# Altium PCB modular8_master_001.PcbDoc
Units mil, origin at the board's own origin, x right, y up, seen from the top; angles counter-clockwise.
Board outline 1417.32 x 1417.32 mil, 2 copper layers (Top Layer, Bottom Layer); 19 components, 33 nets, 119 pads, 79 vias.
Unrouted connection lines stored in the file: 3.
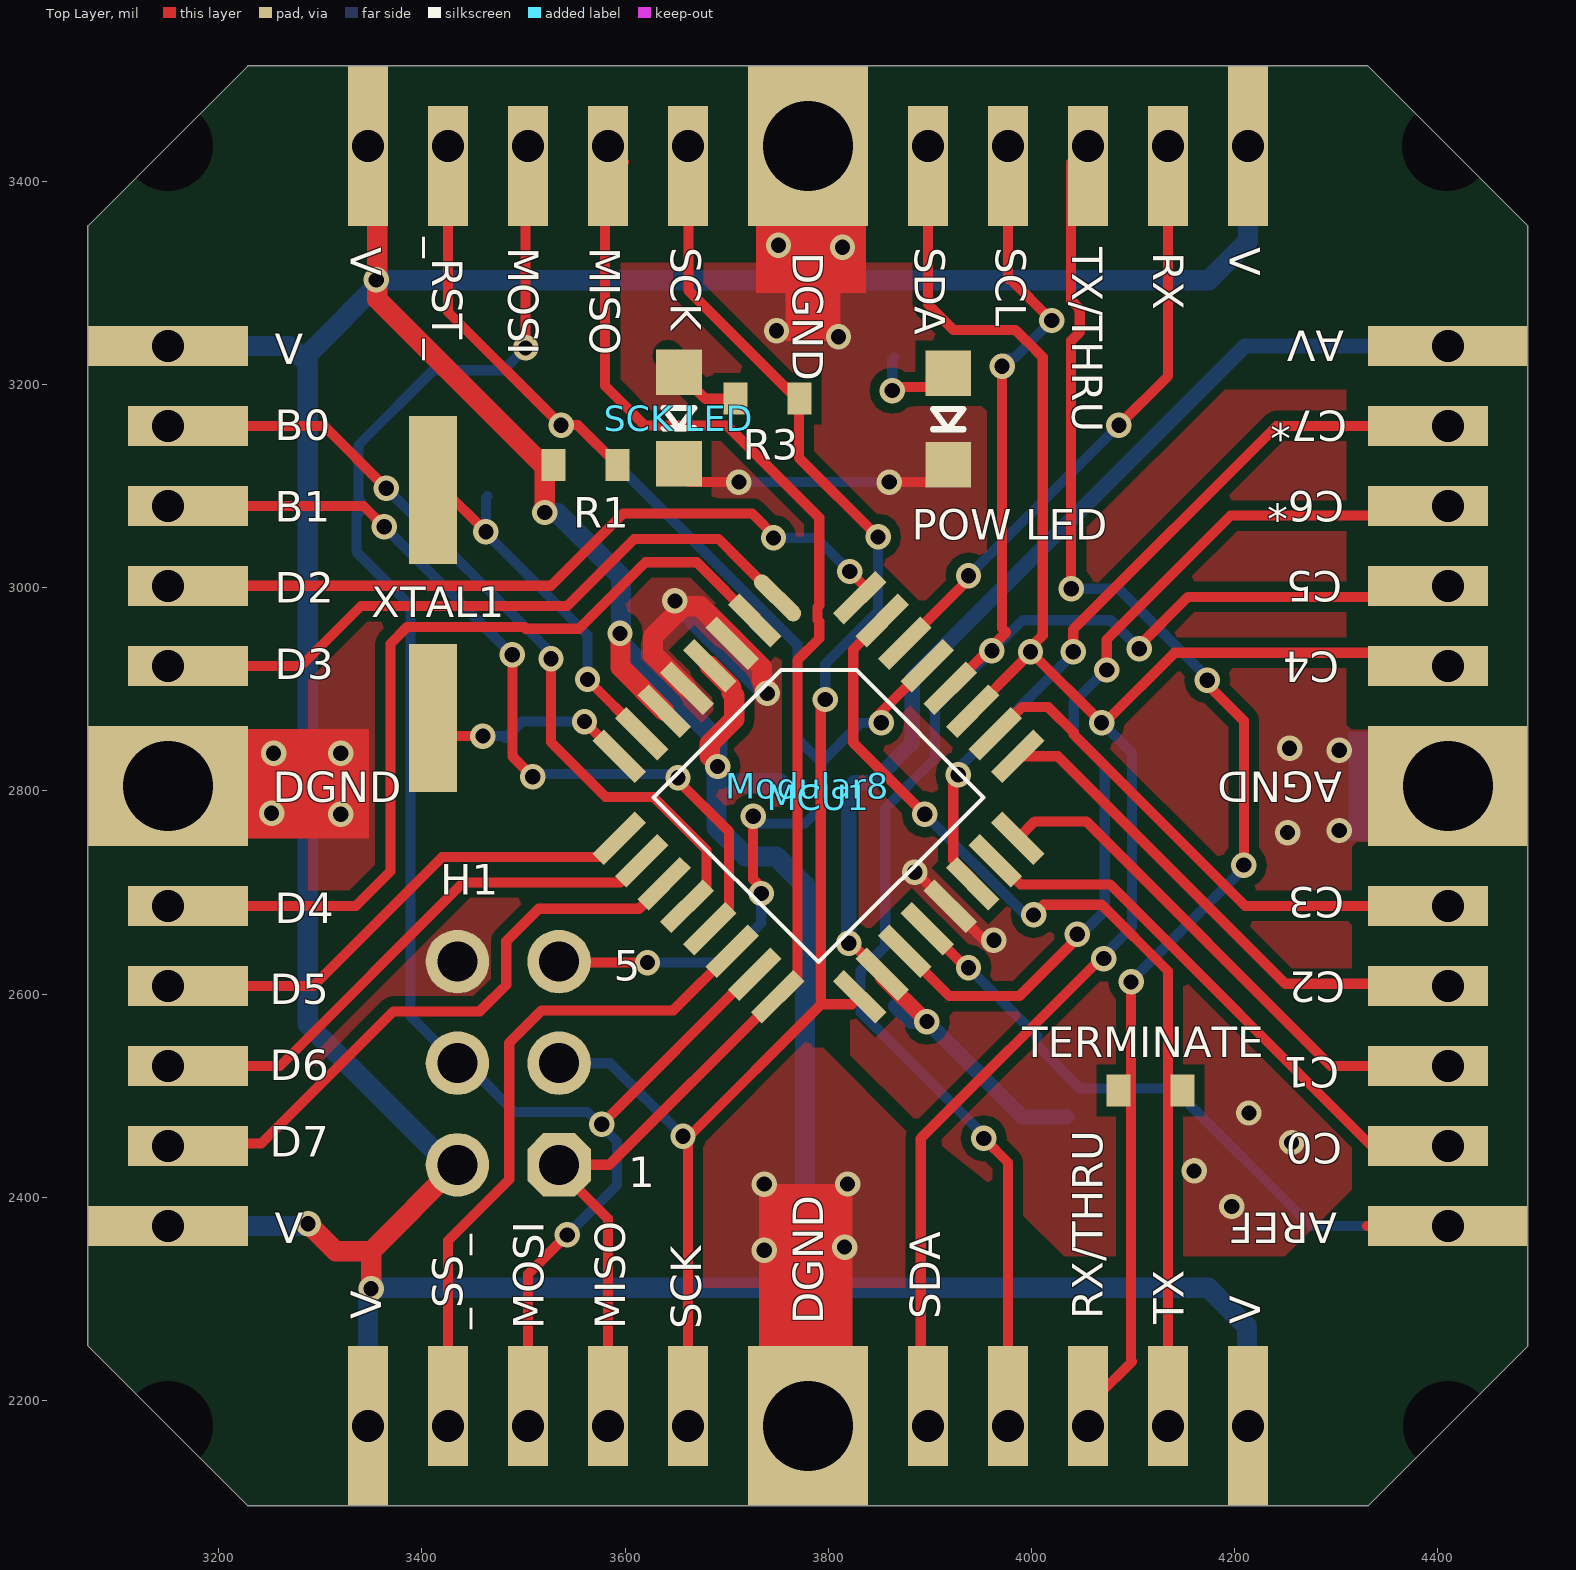
[diagram p0: Top Layer view]
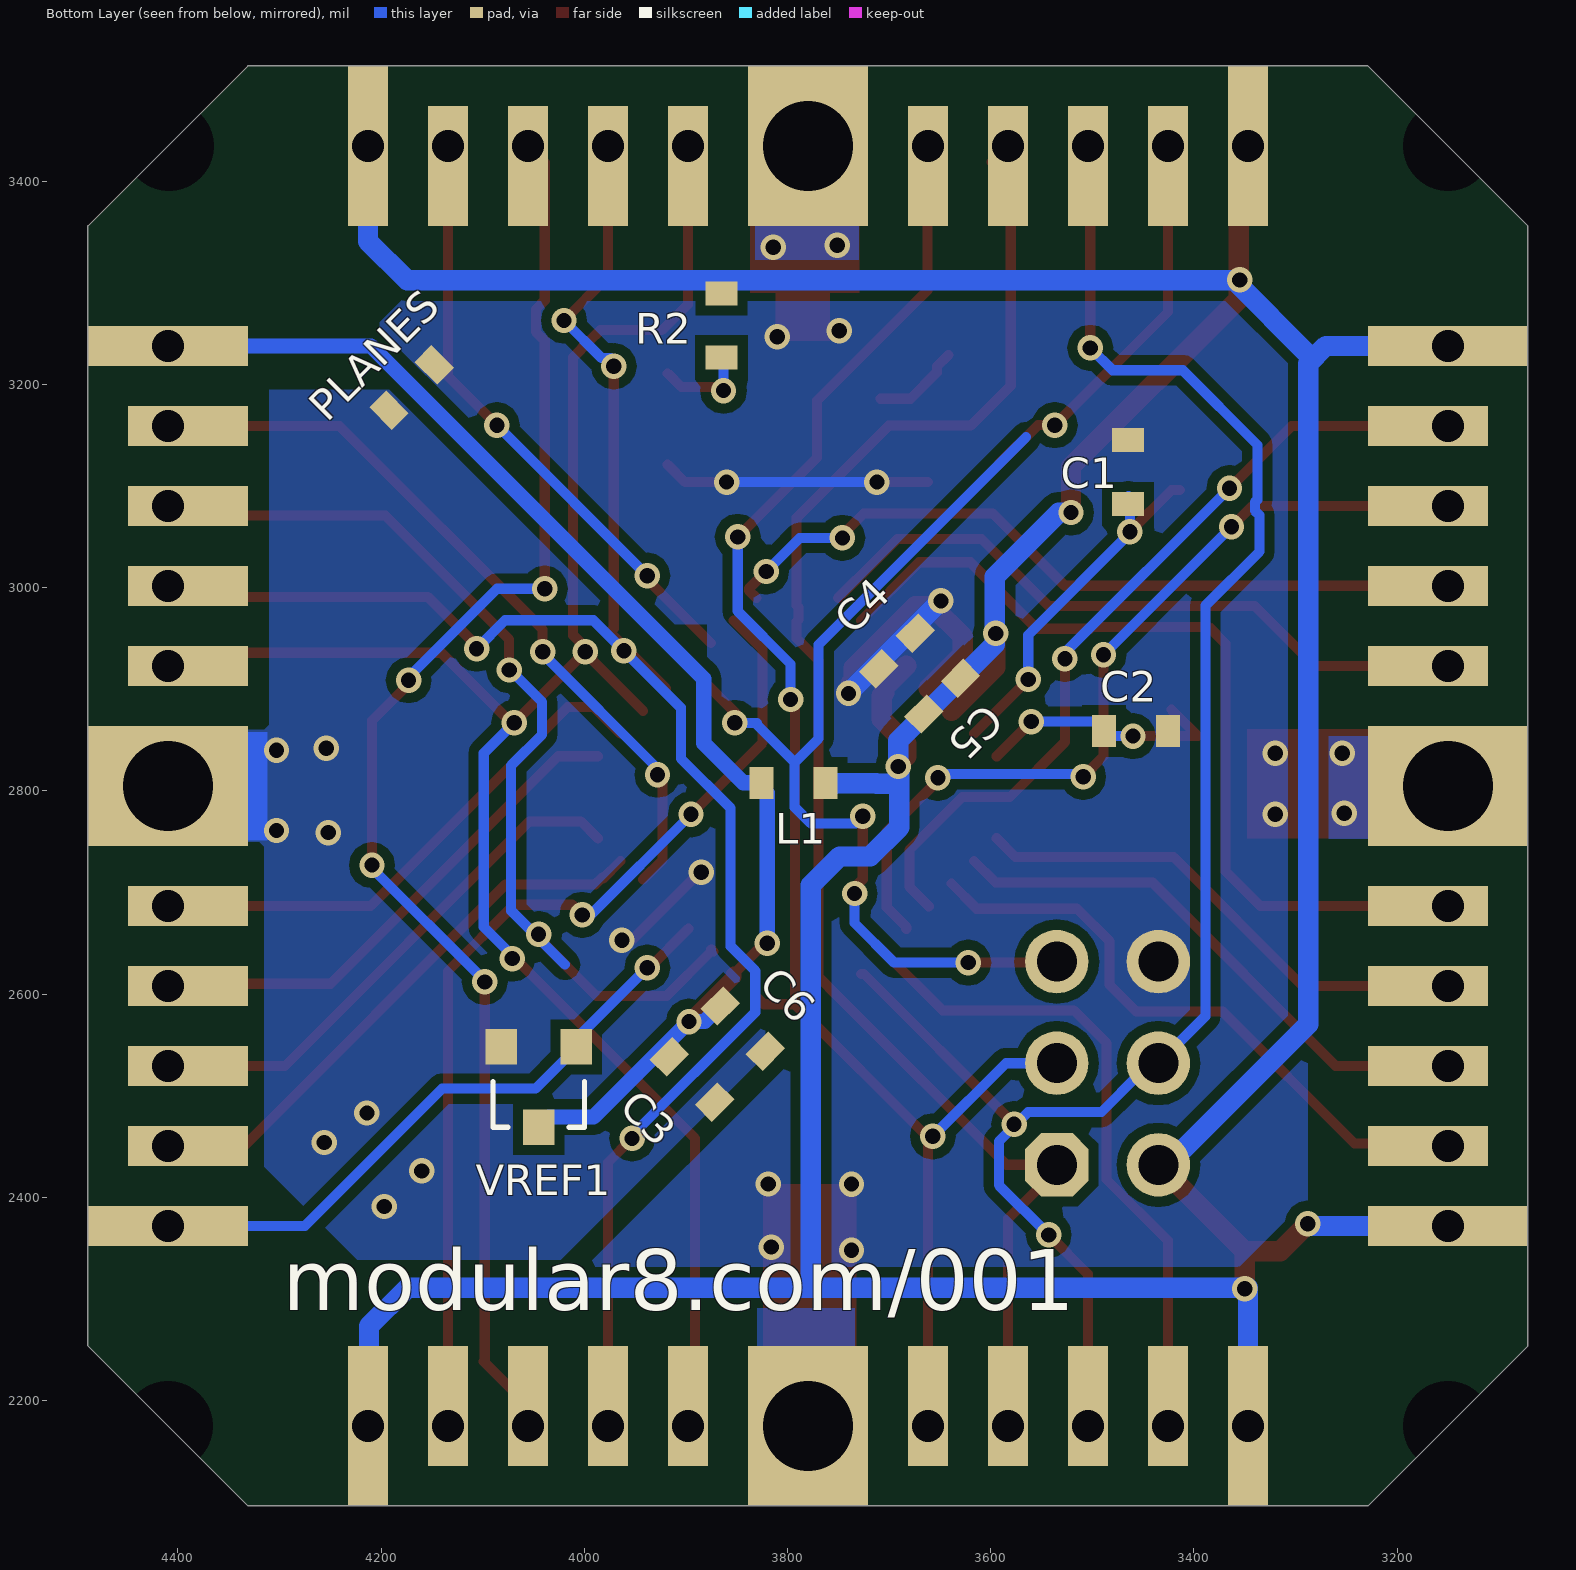
[diagram p1: Bottom Layer view, seen from below]

## Layer stack, top to bottom
Top Solder: solder mask 0.4, Solder Resist, Dk 3.5
Top Layer: signal copper 1.4
Dielectric 1: dielectric 12.6, FR-4, Dk 4.8
Bottom Layer: signal copper 1.4
Bottom Solder: solder mask 0.4, Solder Resist, Dk 3.5

## Board outline
3228.74,3513.58 3071.26,3356.1 3071.26,2253.74 3228.74,2096.26 4331.1,2096.26 4488.58,2253.74 4488.58,3356.1 4331.1,3513.58

## Design rules (kind name [scope] priority, off if disabled: settings)
Clearance [All] p1: gap=10
PlaneConnect [All] p1: planeconnectstyle=Relief reliefexpansion=20 reliefentries=4 reliefconductorwidth=20 reliefairgap=10
PolygonConnect [All] p1: connectstyle=Direct reliefconductorwidth=20 reliefentries=4 polygonreliefangle="90 Angle" airgapwidth=10
RoutingVias [All] p1: holewidth=28 width=50 viastyle="Through Hole" minholewidth=28 minwidth=50 maxholewidth=28 maxwidth=50
SolderMaskExpansion [All] p1: expansion=4
UnpouredPolygon [All] p1: allowunpoured=FALSE
Width [All] p1: maxlimit=20 minlimit=10 preferedwidth=10
28 further rules are at their usual default settings.

## Components (designator, comment, footprint, x,y, rotation, side; value= is the part's Value field where it differs from the comment)
C1 "C 22pF 25V" 0603 3465,3114 r270 bottom
C2 "C 22pF 25V" 0603 3457,2859 r180 bottom
C3 "C 0.1uF 25V" 0603 3894,2516 r45 bottom
C4 "C 1uF 25V" 0603 3652,2933 r45 bottom
C5 "C 0.1uF 25V" 0603 3688,2898 r45 bottom
C6 "C 1uF 25V" 0603 3844,2566 r45 bottom
H1 "3x2 ICSP header" "3X2 THRU HOLES 0.1\" PITCH" 3535,2432 r180 top
L1 "L 10uH" 0603 3794,2808 r180 bottom
MCU1 "ATmega328p" "ATMEGA328P TQFP" 3750,2990 r315 top locked
Modular8 "modular8_rev2" "MODULAR8 METRIC" 3150,2175 r0 top
PLANES "R 0" 0603 4170,3197 r135 bottom
"POW LED" "LEDG" "0805 - LED" 3918,3166 r270 top
R1 "R 10k" 0603 3561,3121 r0 top
R2 "R 680" 0603 3865,3258 r270 bottom
R3 "R 680" 0603 3740,3186 r180 top
"SCK LED" "LEDY" "0805 - LED" 3653,3167 r270 top
TERMINATE "R 0" 0603 4117,2505 r0 top
VREF1 "AD1584BRTZ" SOT-23-3 4045,2469 r0 bottom
XTAL1 "XTAL 14.7456MHz" "XTAL CSM-3X" 3411,2984 r270 top

## Footprints (in the part's own frame and the unit in brackets; to place one, negate y for a bottom-side part, rotate by r counter-clockwise, add the part's x,y. Pads: shape width x height; smd on the part's side, far side on the other; paste and mask are expansions set on the pad)
"3X2 THRU HOLES 0.1\" PITCH" [mil]
  oct 62.5x62.5 hole 39.37 unplated: 1(0,0)
  round 62.5 hole 39.37 unplated: 2(100,0) 3(0,-100) 4(100,-100) 5(0,-200) 6(100,-200)
0603 [mm]
  rect 0.6x0.8 smd: 1(-0.8,0) 2(0.8,0)
  body extent -1.2,-0.5 1.2,0.5, height 0.01
"0805 - LED" [mil]
  rect 45x45 smd: 1(-45,0) 2(45,0)
  silkscreen extent -10,-15 10,15, body extent -72,-27 72,27, height 0
"ATMEGA328P TQFP" [mm]
  oval 1.5x0.4 smd: 1(0,0)
  rect 1.5x0.4 smd: 2(0,-0.8) 3(0,-1.6) 4(0,-2.4) 5(0,-3.2) 6(0,-4) 7(0,-4.8) 8(0,-5.6) 17(8.5,-5.6) 18(8.5,-4.8) 19(8.5,-4) 20(8.5,-3.2) 21(8.5,-2.4) 22(8.5,-1.6) 23(8.5,-0.8) 24(8.5,0)
  rect 0.4x1.5 smd: 9(1.45,-7.05) 10(2.25,-7.05) 11(3.05,-7.05) 12(3.85,-7.05) 13(4.65,-7.05) 14(5.45,-7.05) 15(6.25,-7.05) 16(7.05,-7.05) 25(7.05,1.45) 26(6.25,1.45) 27(5.45,1.45) 28(4.65,1.45) 29(3.85,1.45) 30(3.05,1.45) 31(2.25,1.45) 32(1.45,1.45)
  silkscreen extent 1.34,-5.72 7.17,0.12, body extent 1.28,-5.77 7.22,0.17
"MODULAR8 METRIC" [mm]
  rect 0x0 hole 2.25 unplated copper offset 0.5,0: 999(0,0) 999(0,32) 999(31.976,32) 999(32,0)
  rect 3x1 hole 0.8 copper offset 0.5,0: A_0(0,25) A_1(0,23) A_2(0,21) A_3(0,19) A_4(0,13) A_5(0,11) A_6(0,9) A_7(0,7)
  rect 4x3 hole 2.25: A_GND(0,16) C_GND(32,16)
  rect 4x1 hole 0.8: A_V1(0,27) A_V2(0,5) C_V1(32,5) C_V2(32,27)
  rect 1x3 hole 0.8 copper offset 0,0.5: B_0(7,0) B_1(9,0) B_2(11,0) B_3(13,0) B_4(19,0) B_5(21,0) B_6(23,0) B_7(25,0)
  rect 3x4 hole 2.25: B_GND(16,0) D_GND(16,32)
  rect 1x4 hole 0.8: B_V1(5,0) B_V2(27,0) D_V1(27,32) D_V2(5,32)
  rect 3x1 hole 0.8 copper offset -0.5,0: C_0(32,7) C_1(32,9) C_2(32,11) C_3(32,13) C_4(32,19) C_5(32,21) C_6(32,23) C_7(32,25)
  rect 1x3 hole 0.8 copper offset 0,-0.5: D_0(25,32) D_1(23,32) D_2(21,32) D_3(19,32) D_4(13,32) D_5(11,32) D_6(9,32) D_7(7,32)
  body extent -2,-2 34,34
SOT-23-3 [mil]
  rect 31x35 smd: 1(-37,-79) 2(37,-79) 3(0,0)
  silkscreen extent -45,-45 45,0, body extent -56,-100 56,22, height 45
"XTAL CSM-3X" [mm]
  rect 3.7x1.2 smd: 1(-2.85,0) 2(2.85,0)
  body extent -4.63,-2.18 4.63,2.18, height 2

## Via types
v1: diameter 25, hole 15, Top Layer to Bottom Layer, 79 vias

## Nets (pads, with @x,y where several pads share a name; then routed paths per layer and width w, separated by ;. In a path a pad name is that pad's centre, name@x,y a point inside that pad or via, vN(x,y) a via of type N, cw(c..) or ccw(c..) an arc to the next point about the centre after c; other vN are vias at no path point)
AGND: C3.1 C6.1 MCU1.21 Modular8.C_GND PLANES.1 VREF1.2 | length 105.8
  Top Layer w10: v1(3885,2720) 3886.37,2720 MCU1.21 3953.37,2653 v1(3963,2653)
  other v1: 4197,2391 4160,2426 4256,2454 4214,2483 4252,2759 4303,2761 4303,2840 4254,2842
AREF: MCU1.20 Modular8.C_V1 VREF1.1 | length 718.4
  Top Layer w10: MCU1.20 3935.83,2626 v1(3938,2626) ; 4330.15,2371.85 Modular8.C_V1@4409.84,2371.85
  Bottom Layer w10: v1(3938,2626) 4006,2558 4006,2549 4048,2507 4140,2507 4275.15,2371.85 Modular8.C_V1@4409.84,2371.85
AVCC: C3.2 C6.2 L1.1 MCU1.18 Modular8.C_V2 VREF1.3 | length 1272.1
  Top Layer w10: v1(3820,2650) 3822.75,2650 MCU1.18
  Top Layer w15: MCU1.18 3853,2617 v1(3897,2573)
  Bottom Layer w15: v1(3820,2650) L1.1@3820,2798 ; L1.1 3843.5,2808 3882.5,2847 3882.5,2910.5 4209.99,3237.99 Modular8.C_V2 ; C6.2 3881.54,2573 v1(3897,2573) 3991,2479 VREF1.3@4035,2479
DGND: "POW LED.2" "SCK LED.1" C1.1 C2.2 C4.2 C5.2 H1.6 MCU1.3 MCU1.5 Modular8.A_GND Modular8.B_GND Modular8.D_GND PLANES.2 | length 1140.8
  Top Layer w10: 3662,3104 v1(3712,3104) ; v1(3737,2413) 3737,2217.92 3819,2184.73 v1(3819,2413.08) ; v1(3860,3104) 3901,3104 3918,3121
  Top Layer w20: MCU1.5 3627.5,2934.33 3627.5,2952 3657.4,2981.9 3674.13,2981.9 3734.76,2921.28 3734.76,2908.92 3737.36,2906.32 3737.36,2898.64 v1(3740,2896)
  Bottom Layer w10: v1(3712,3104) v1(3860,3104)
  Bottom Layer w20: v1(3649,2987) v1(3740,2896)
  other v1: 3737,2348 3816,2351 3320,2777 3252,2778 3254,2837 3320,2837 3810,3247 3749,3253 3814,3335 3751,3337
MISO: H1.1 MCU1.16 Modular8.B_2 Modular8.D_5 | length 1594.7
  Top Layer w10: H1.1@3517,2432 3584.53,2432 MCU1.16 3769.5,2616.97 3769.5,2928.5 3791,2950 3791,2966.76 3789.29,2968.48 3789.29,2980.9 3791,2982.62 3791,3069 3700.5,3159.5 3619.5,3159.5 3580.24,3198.76 3580.24,3432.01 Modular8.D_5 Modular8.D_5@3599,3418.91 ; H1.1@3530,2432 3583.07,2378.93 Modular8.B_2
MOSI: H1.4 MCU1.15 Modular8.B_1 Modular8.D_6 | length 1827.1
  Top Layer w10: H1.4@3417,2532 H1.4 H1.4@3437,2532 ; v1(3502,3236) 3502,3391.17 3514,3403.17 3496,3421.17 3507,3432.17 Modular8.D_6 ; Modular8.B_1 3504.33,2324.33 v1(3543,2363) ; v1(3577,2472) 3724.74,2619.74 MCU1.15
  Bottom Layer w10: v1(3502,3236) 3480,3214 3411,3214 3337.5,3140.5 3337.5,3086.61 3340,3084.11 3340,3075.89 3335.5,3071.39 3335.5,3035.5 3388.75,2982.25 3388.75,2578.25 H1.4 3435,2514 3442,2521 3454,2521 3491,2484 3563,2484 3592,2455 3592,2412 v1(3543,2363)
NetC1_2: C1.2 MCU1.7 XTAL1.1 | length 363.8
  Top Layer w10: XTAL1.1@3414,3096.2 3421.8,3096.2 v1(3463,3055) ; v1(3563,2909.75) MCU1.7
  Bottom Layer w10: C1.2@3464.5,3090 3463,3088.5 v1(3463,3055) 3463,3053.5 3563,2953.5 v1(3563,2909.75)
NetC2_1: C2.1 MCU1.8 XTAL1.2 | length 256.3
  Top Layer w10: XTAL1.2@3422.2,2880 3414,2871.8 3396.2,2854 v1(3460,2854) ; v1(3560,2868.2) MCU1.8
  Bottom Layer w10: v1(3460,2854) 3480,2854 3482,2852 3498.2,2868.2 v1(3560,2868.2)
NetMCU1_1: MCU1.1 Modular8.A_3 | length 675.8
  Top Layer w10: Modular8.A_3 3281.03,2923.03 3340,2982 3543,2982 3609,3048 3692,3048 3714.42,3025.58 MCU1.1
NetMCU1_2: MCU1.2 Modular8.A_4 | length 874.3
  Top Layer w10: Modular8.A_4 3334.81,2686.81 3369,2721 3369,2945 3385.5,2961.5 3500.39,2961.5 3502.26,2959.63 3554.63,2959.63 3620,3025 3670.46,3025 MCU1.2
NetMCU1_9: MCU1.9 Modular8.A_5 | length 504.3
  Top Layer w10: Modular8.A_5 3293.07,2608.07 3420,2735 3575.73,2735 MCU1.9
NetMCU1_10: MCU1.10 Modular8.A_6 | length 549.9
  Top Layer w10: Modular8.A_6 3260.33,2529.33 3441,2710 3595.28,2710 MCU1.10
NetMCU1_11: MCU1.11 Modular8.A_7 | length 620.8
  Top Layer w10: Modular8.A_7 3152.41,2453 3242,2453 3372,2583 3457,2583 3483,2609 3483,2652 3515,2684 3613.82,2684 MCU1.11
NetMCU1_12: MCU1.12 Modular8.A_0 | length 817.8
  Top Layer w10: Modular8.A_0 3303.75,3159.25 v1(3365,3098) ; v1(3527,2930) 3527,2848 3581,2794 3628,2794 3680.09,2741.91 3680.09,2705.73 MCU1.12
  Bottom Layer w10: v1(3365,3098) 3527,2936 v1(3527,2930)
NetMCU1_13: MCU1.13 Modular8.A_1 | length 851
  Top Layer w10: Modular8.A_1 3342.49,3080.51 v1(3363,3060) ; v1(3489,2934) 3489,2834 v1(3509,2814) ; v1(3652,2813) 3652,2810.11 3702.36,2759.75 3702.36,2685.36 3683.19,2666.19 MCU1.13
  Bottom Layer w10: v1(3363,3060) v1(3489,2934) ; v1(3509,2814) 3511.5,2816.5 3648.5,2816.5 v1(3652,2813)
NetMCU1_19: MCU1.19 Modular8.C_6 | length 979.7
  Top Layer w10: MCU1.19@3875,2644.03 3872.99,2642.01 MCU1.19 3919.29,2598 3988,2598 4045,2655 v1(4045,2659) ; v1(4074,2919) 4074,2949 4196,3071 4400.33,3071 Modular8.C_6
  Bottom Layer w10: 4019,2629 4072,2682 4072,2825.11 4041.5,2855.61 4041.5,2887.5 4073,2919 v1(4074,2919)
NetMCU1_22: MCU1.22 Modular8.C_7 | length 754.7
  Top Layer w10: v1(3928,2816) 3922.91,2810.91 3922.91,2732.09 MCU1.22@3942.09,2712.91 ; v1(4041,2937) 4041,2959 4241.25,3159.25 Modular8.C_7
  Bottom Layer w10: v1(3928,2816) 3928,2822 4041,2935 v1(4041,2937)
NetMCU1_23: MCU1.23 Modular8.C_0 | length 562.4
  Top Layer w10: MCU1.23 3981.78,2713.67 3982.61,2714.5 3989.11,2708 4077.28,2708 4334.69,2450.59 Modular8.C_0
NetMCU1_24: MCU1.24 Modular8.C_1 | length 529.8
  Top Layer w10: MCU1.24 4003.26,2770 4054,2770 4294.67,2529.33 Modular8.C_1
NetMCU1_25: MCU1.25 Modular8.C_2 | length 518.1
  Top Layer w10: MCU1.25 4025.9,2834.1 4249.84,2610.16 4409.84,2610.16 Modular8.C_2
NetMCU1_26: MCU1.26 Modular8.C_3 | length 538.5
  Top Layer w10: MCU1.26 3990.49,2882.5 4016.5,2882.5 4041.5,2857.5 4041.5,2855.61 4210.3,2686.81 Modular8.C_3
NetMCU1_30: MCU1.30 Modular8.D_0 | length 593.5
  Top Layer w10: MCU1.30 3934.82,3005 3933,3006.82 v1(3938,3011.82) ; v1(4086,3160) 4134.25,3208.25 Modular8.D_0
  Bottom Layer w10: v1(3938,3011.82) v1@4082.85,3156.67
NetMCU1_32: MCU1.32 Modular8.A_2 | length 766.3
  Top Layer w10: Modular8.A_2 3150,3002 3527,3002 3598,3073 3725,3073 3749,3049 v1(3746,3049) ; v1(3821,3016) 3838,2999 3838,2997.27 MCU1.32
  Bottom Layer w10: v1(3746,3049) 3788,3049 v1(3821,3016)
"NetPOW LED_1": "POW LED.1" R2.2 | length 92.9
  Top Layer w10: v1@3864,3197.5 3904.5,3197.5 3918,3211
  Bottom Layer w10: v1(3863,3194) 3863,3224.5 R2.2
NetR3_2: "SCK LED.2" R3.2 | length 87.8
  Top Layer w10: 3641.81,3228.9 3653,3217.72 3653,3212 3679,3186 R3.2
PGM: MCU1.14 Modular8.B_0 | length 669.5
  Top Layer w10: Modular8.B_0@3418,2182.59 Modular8.B_0 3425.59,2357.18 3486,2417.59 3486,2552 3518,2584 3647.44,2584 MCU1.14
R\S\T\: H1.5 MCU1.29 Modular8.D_7 R1.2 | length 1421
  Top Layer w10: Modular8.D_7 3425.59,3271.41 v1(3537,3160) 3553.5,3160 R1.2 ; H1.5@3517,2632 3523,2638 3530,2631 v1(3622,2631) ; v1(3726,2775) 3726,2713 3737,2702 v1(3734,2699) ; v1@3850.36,2876 MCU1.29
  Bottom Layer w10: 3565.24,3148.25 3769.5,2944 3769.5,2851.5 3793,2828 ; v1(3622,2631) 3695,2631 3734,2670 v1(3734,2699) ; v1(3726,2775) 3733,2768 3777,2768 3793,2784 3793,2828 ; v1(3852,2867) 3830,2867 3831,2866 3793,2828
SCK: H1.3 MCU1.17 Modular8.B_3 Modular8.D_4 R3.1 | length 1619.8
  Top Layer w10: Modular8.B_3 3661.81,2458.81 3793,2590 ; Modular8.D_4 3662.27,3434.38 3662.27,3292.84 3771,3184.11 3771,3128 v1(3849,3050) ; v1(3797,2890) 3792.5,2894.5 3792.5,2590 3823.26,2590 MCU1.17
  Bottom Layer w10: H1.3 3585,2532 v1(3657,2460) ; Modular8.D_4@3660,3433.03 Modular8.D_4 ; v1(3797,2890) 3797,2925 3849,2977 v1(3849,3050)
SCL: MCU1.28 Modular8.B_5 Modular8.C_5 Modular8.D_2 | length 1981.1
  Top Layer w10: MCU1.28 3975,2956.1 3971,2960.1 v1(3971,3218) ; v1(3953,2458) 3976.77,2434.23 Modular8.B_5 ; Modular8.D_2 3976.77,3303.77 3978,3305 v1(4020,3263) ; v1(4106,2940) 4106,2943 4154,2991 4399.07,2991 Modular8.C_5
  Bottom Layer w10: v1(3953,2458) 3953,2461 3831.78,2582.22 3831.78,2622.89 3856,2647.11 3856,2782.89 3905,2831.89 3905,2881.89 3991.11,2968 4078,2968 v1(4106,2940) ; v1(3971,3218) 3971,3223 3974,3226 3983,3226 v1(4020,3263)
  other v1: 3961,2938
SDA: MCU1.27 Modular8.B_4 Modular8.C_4 Modular8.D_3 | length 1940.6
  Top Layer w10: Modular8.B_4 3891,2182.03 3891,2458 4068,2635 v1(4071,2635) ; Modular8.D_3 3898.03,3278.97 3923.5,3253.5 3984.39,3253.5 3994.89,3243 3995,3243 4011,3227 4011,2953.21 3992,2934.21 3992,2928.56 MCU1.27 ; v1(3999,2937) v1(4069,2867) 4071.89,2867 4140.89,2936 4396.87,2936 Modular8.C_4
  Bottom Layer w10: v1(4069,2867) 4099,2837 4099,2666 4068,2635 v1(4071,2635)
THRU: Modular8.B_6 Modular8.D_1 TERMINATE.1 | length 1443.3
  Top Layer w10: v1(4039,2999) 4039,3243.11 4047.5,3251.61 4047.5,3274.39 4039,3282.89 4039,3418.33 Modular8.D_1 ; Modular8.B_6 4065,2184.49 4057,2192.49 4068,2203.49 4066,2205.49 4099,2238.49 4098,2239.49 v1(4098,2612) ; v1(4173,2909) 4173,2905 4209,2869 v1(4209,2727)
  Bottom Layer w10: v1(4039,2999) 4085.89,2999 v1@4174.45,2910.45 ; v1(4098,2612) 4098,2613 v1@4211,2726
TX: MCU1.31 Modular8.B_7 TERMINATE.2 | length 991
  Top Layer w10: MCU1.31 3824.5,2939.22 3824.5,2847.5 v1(3895,2777) ; v1(4002,2678) 4012,2688 4069,2688 4134.25,2622.75 Modular8.B_7
  Bottom Layer w10: v1(3895,2777) 3895,2776.78 3993.78,2678 v1(4002,2678)
VCC: C4.1 C5.1 H1.2 L1.2 MCU1.4 MCU1.6 Modular8.A_V1 Modular8.A_V2 Modular8.B_V1 Modular8.B_V2 Modular8.D_V1 Modular8.D_V2 R1.1 R2.1 | length 5126.9
  Top Layer w20: v1(3288,2374) 3315,2347 3350,2347 ; Modular8.D_V2@3346.85,3434.84 3356,3425.69 3356,3284 3521,3119 v1(3521,3074) ; v1(3350,2310) 3350,2347 ; H1.2 3350,2347 ; v1(3595,2955) 3595.5,2954.5 3595.5,2921.79 MCU1.6 ; MCU1.4 3704.76,2901.62 3704.76,2896.5 3707.36,2893.89 3707.36,2870.36 3683.29,2846.29 3683.29,2834
  Bottom Layer w20: Modular8.A_V2@3150,2371.85 v1@3286.15,2371.85 ; Modular8.A_V1 3270.01,3237.99 3287.5,3220.5 3287.5,2570.5 3417,2441 H1.2@3417,2432 ; 3287.5,3229.5 3360.5,3302.5 4174.5,3302.5 4212.99,3340.99 Modular8.D_V1 ; Modular8.B_V1@3346.85,2175 3346.85,2311.15 3777,2311.15 ; v1(3521,3074) 3533,3074 3596,3011 3596,2944.46 C4.1 3691,2849.46 v1@3691,2826 ; v1@3690,2826 3690,2764 3718.5,2735.5 3748.5,2735.5 3777,2707 3777,2311.15 ; 3691,2807 3712.04,2807 3712.54,2807.5 3752,2807.5 L1.2@3752.5,2807 ; Modular8.B_V2 4212,2175.99 4212,2273 4173.85,2311.15 3777,2311.15
  other v1: 3691,2824 3355,3303
pads on no net: Modular8.999

## Polygon pours and split planes (outlines as drawn)
AGND on Top Layer "Bottom Layer-No Net" (solid, pour order 6): 4345,2860 4315,2860 4310,2865 4310,3195 4190,3195 3885,2890 3830,2835 3830,2665 3835,2665 3821.73,2651.73 3821.73,2540 3908.36,2453.36 3966.32,2407.68 4032,2342 4249.32,2342 4315,2407.68 4315,2725 4315,2745 4320,2750 4335,2750 4335,2855
DGND on Top Layer "Bottom Layer-No Net" (solid, remove dead copper, pour order 8): 4284,3235 4284,3236 4198,3322 4196,3320 3328,3320 3274,3266 3288,3252 3288,2374 3288,2372 3350,2310 3351,2311 3976.77,2311 3976.77,2365.23 3975,2367 3795,2547 3784,2547 3784,2806 3803,2825 4217,3239 4271,3239
DGND on Bottom Layer "Bottom Layer-No Net" (solid, remove dead copper, pour order 7): 3730,3367 3730,3306 3727,3309 3397,3309 3384,3309 3291,3216 3286,3211 3286,2854 3199,2854 3197,2852 3207,2842 3207,2753 3280,2753 3286,2747 3288,2745 3288,2445 3288,2372 3350,2310 3734,2310 3734,2234 3729,2229 3736,2236 3830,2236 3830,2304 3826,2308 4162,2308 4166,2312 4018,2312 3791.5,2538.5 3791.5,2588.5 3879,2676 3879,2964 3911,2964 4205,3258 4152,3311 4152,3316 3843,3316 3836,3309 3832,3313 3832,3388
AGND on Bottom Layer "Bottom Layer-No Net" (solid, pour order 5): 4345,2860 4315,2860 4310,2865 4310,3195 4190,3195 3885,2890 3830,2835 3830,2665 3835,2665 3821.73,2651.73 3821.73,2540 3908.36,2453.36 3987.73,2374 4023.36,2338.36 4223.36,2338.36 4259,2374 4315,2430 4315,2725 4315,2745 4320,2750 4335,2750 4335,2855

## Other copper
Top Layer:
  rectangle net DGND: 3758,3243 3812,3310
  rectangle net DGND: 3729,3290 3837,3366
  rectangle net DGND: 3222,2753 3348,2861
  rectangle net DGND: 3737,2234 3819,2413.08
Bottom Layer:
  rectangle net AGND: 4312,2751 4356,2858

## Silkscreen, mask and mechanical layers (free items; w line width, h text height)
Top Overlay:
  text "_RST_" at 3410,3345 h30 r270
  text "V" at 3330,3335 h30 r270
  text "MOSI" at 3485,3335 h30 r270
  text "MISO" at 3565,3335 h30 r270
  text "SCK" at 3645,3335 h30 r270
  text "SDA" at 3885,3335 h30 r270
  text "SCL" at 3965,3335 h30 r270
  text "TX/THRU" at 4040,3335 h30 r270
  text "V" at 4195,3335 h30 r270
  text "DGND" at 3765,3330 h30 r270
  text "RX" at 4120,3330 h30 r270
  text "AV" at 4308,3253 h30 r180
  text "V" at 3255,3220 h30
  text "C7*" at 4311,3174 h30 r180
  text "B0" at 3255,3145 h30
  text "C6*" at 4308,3095 h30 r180
  text "B1" at 3255,3065 h30
  text "C5" at 4306,3016 h30 r180
  text "D2" at 3255,2985 h30
  text "C4" at 4303,2937 h30 r180
  text "D3" at 3255,2910 h30
  text "AGND" at 4306,2819 h30 r180
  text "DGND" at 3253,2789 h30
  text "C3" at 4308,2705 h30 r180
  text "D4" at 3255,2670 h30
  text "C2" at 4309,2622 h30 r180
  text "5" at 3589,2613 h30
  text "D5" at 3250,2590 h30
  text "C1" at 4303,2538 h30 r180
  text "D6" at 3250,2515 h30
  text "C0" at 4306,2463 h30 r180
  text "D7" at 3250,2440 h30
  text "1" at 3603,2410 h30
  text "AREF" at 4301,2385 h30 r180
  text "V" at 3255,2355 h30
  text "V" at 3360,2280 h30 r90
  text "SDA" at 3910,2280 h30 r90
  text "RX/THRU" at 4070,2280 h30 r90
  text "DGND" at 3795,2275 h30 r90
  text "TX" at 4150,2275 h30 r90
  text "V" at 4225,2275 h30 r90
  text "_SS_" at 3440,2270 h30 r90
  text "MOSI" at 3520,2270 h30 r90
  text "MISO" at 3600,2270 h30 r90
  text "SCK" at 3675,2270 h30 r90
Bottom Overlay:
  text "modular8.com/001" at 4297,2289 h60